# Altium PCB CrashDAQ For Hammond 1554H.PcbDoc (part 2 of 2)
Units mil, origin at the board's own origin, x right, y up, seen from the top; angles counter-clockwise.
Board outline 6580.35 x 4200 mil, 2 copper layers (Top Layer, Bottom Layer); 103 components, 88 nets, 462 pads, 122 vias.
Unrouted connection lines stored in the file: 5.
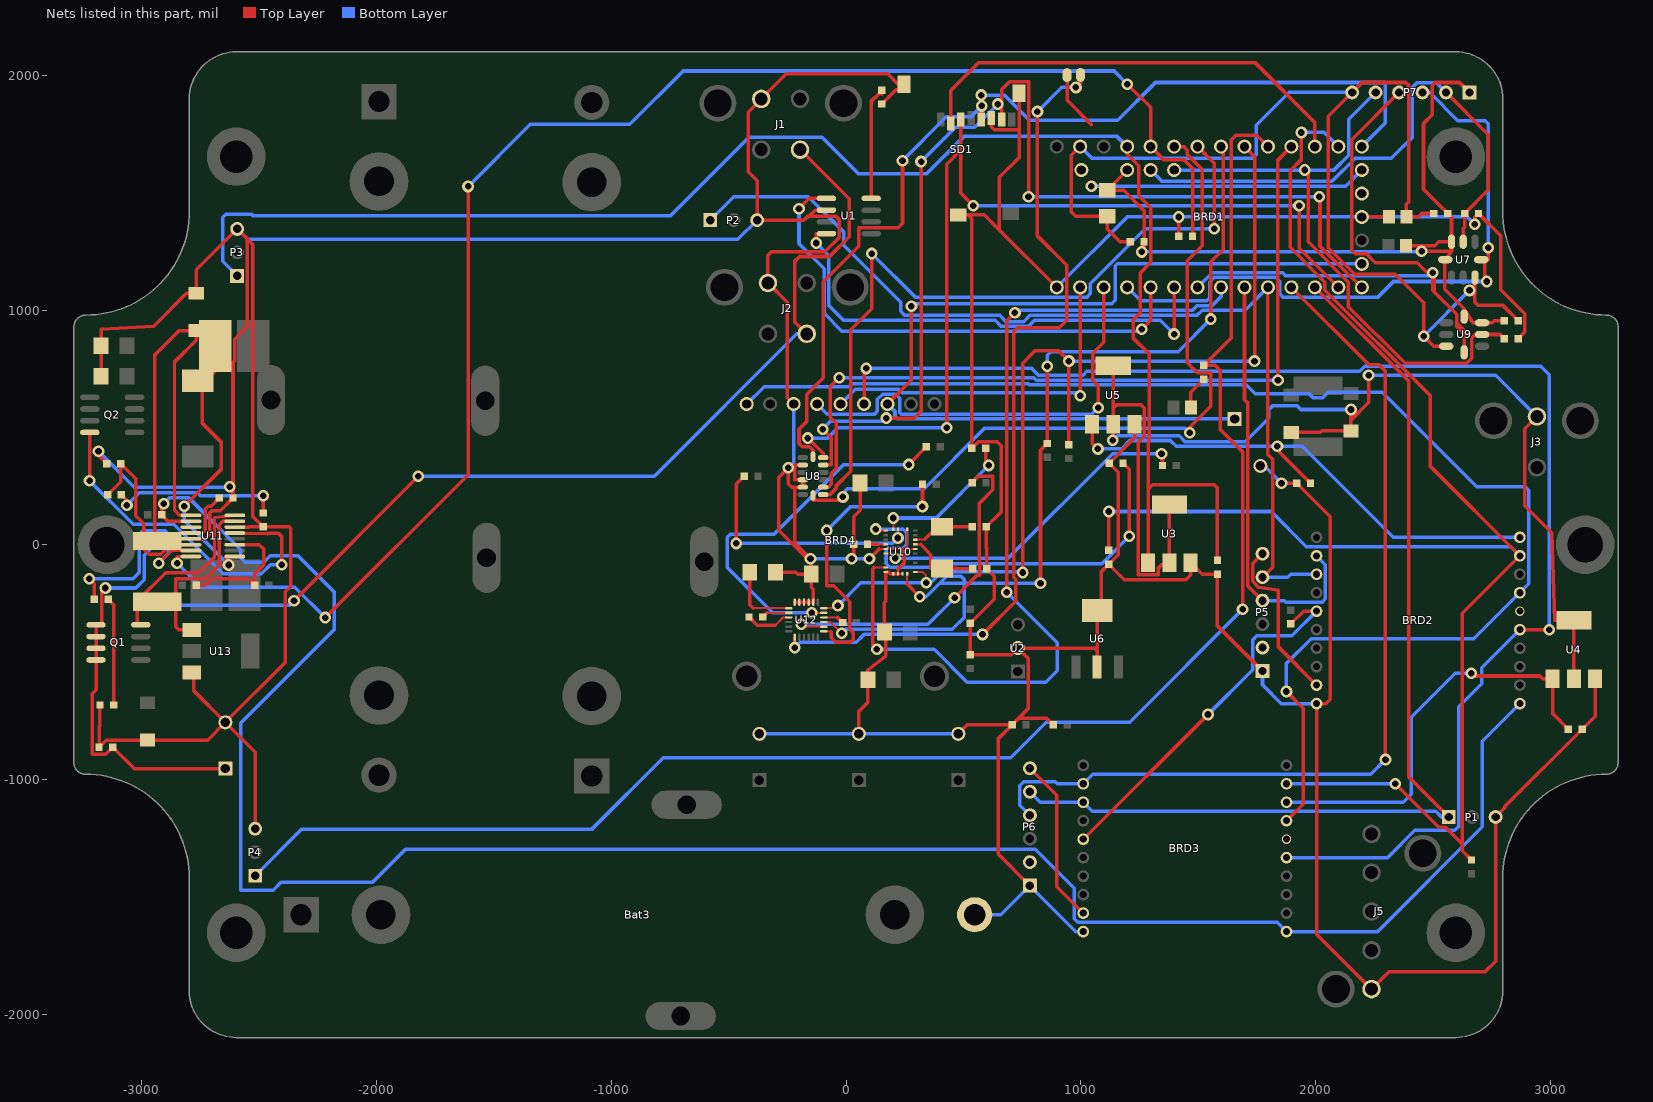
[diagram p2: the nets of this part, all layers, seen from the top]

## Via types
v1: diameter 50, hole 28, Top Layer to Bottom Layer, 122 vias

## Nets (pads, with @x,y where several pads share a name; then routed paths per layer and width w, separated by ;. In a path a pad name is that pad's centre, name@x,y a point inside that pad or via, vN(x,y) a via of type N, cw(c..) or ccw(c..) an arc to the next point about the centre after c; other vN are vias at no path point) (continued)
GND: Bat3.2 Batt1.2 BRD1.14 BRD1.17 BRD2.10 BRD3.10 BRD4.7 C3.2 C4.2 C5.1 C6.1 C7.2 C8.1 C9.1 C10.1 C12.1 C16.2 C17.1 C18.1 C19.2 C20.1 C21.1 C22.1 C23.1 C24.1 C25.1 C26.1 C27.1 C28.1 C29.1 C30.1 D3.1 J1.4 J2.4 J5.5 L2.1 NTC1.1 P1.3 P2.3 P3.3 P4.3 P5.1 P6.1 R1.1 R4.1 R8.1 R9.1 R10.1 R20.2 R21.1 R22.1 SD1.6 U1.2 U2.2 U3.3 U4.3 U5.3 U6.2 U6.4 U8.2 U8.4 U8.5 U10.2 U10.10 U10.15 U10.16 U10.17 U10.18 U10.25 U11.5 U11.14 U12.2 U12.3 U12.4 U12.5 U12.6 U13.3 Z2.2 | length 32903.1
  Top Layer w8.86: 140.85,-18.27 U10.10@169.54,-18.27 ; 221.21,-104.54 U10.17@221.21,-124.53 U10.18@240.89,-124.53 ; 234.8,-18.27 U10.10@169.54,-18.27 ; U10.2@260.58,65.47 260.58,-13.54 U10.10@169.54,-18.27 ; 265.3,-18.27 U10.25@294.48,-18.27
  Top Layer w14.17: U11.5@-2791.34,24.9 -2730.43,24.9 -2710.93,44.4 -2710.93,135.27
  Top Layer w15: v1(-3185.43,398.46) -3185.43,381.29 C21.1@-3149.61,345.47 ; C22.1@-3179.13,-683.07 -3179.13,-771.61 -3183.07,-775.54 C18.1@-3183.07,-863.19 -3152.56,-832.68 D3.1@-2976.38,-832.68 -2720.47,-832.68 C16.2@-2644.69,-756.89 ; C29.1@-3174.21,718.5 C30.1@-3174.21,847.44 -3174.21,918.96 -2950.43,931.46 -2810.48,1071.4 Z2.2@-2768.7,1071.4 -2768.7,1171.45 P3.3@-2594.49,1345.67 -2552.43,1303.61 ; U13.3@-2787.4,-544.29 -2780.43,-544.29 -2780.43,-621.15 C16.2@-2644.69,-756.89 ; -2710.93,135.27 -2701.7,144.49 -2666.54,144.49 R20.2@-2612.21,198.82 v1@-2612.21,232.24 ; v1(-2626.43,246.46) v1@-2612.21,232.24 ; U11.14@-2604.33,74.9 -2544.43,74.9 -2543.54,75.79 NTC1.1@-2483.27,75.79 ; P4.3@-2517.72,-1210.43 -2517.72,-883.86 C16.2@-2644.69,-756.89 ; C19.2@-300.2,-117.13 -213.8,-117.13 -205.93,-125 C23.1@-148.62,-125 ; BRD4.7@-223.3,599.28 -250.43,626.41 -250.43,1032.9 J2.4@-332.68,1115.16 -332.68,1233.7 -318.43,1247.96 -90.43,1247.96 -29.82,1308.56 -29.82,1385.85 -44.43,1400.46 -155.88,1400.46 ; U12.6@-218.5,-245.08 U12.5@-198.82,-245.08 U12.4@-179.13,-245.08 U12.3@-159.45,-245.08 U12.2@-139.76,-245.08 -139.76,-189.54 -148.62,-180.69 C23.1@-148.62,-125 ; U8.2@-183.96,339.57 -218.43,339.57 -219.43,338.57 -219.43,277.57 -218.43,276.57 U8.4@-183.96,276.57 U8.5@-183.96,245.08 -219.43,245.08 ; v1(-151.43,-59.54) -219.43,8.46 -219.43,245.08 ; U1.2@-83.66,1425.59 -130.74,1425.59 -155.88,1400.46 ; v1(23.57,-59.54) 32.48,-50.64 C17.1@32.48,1.97 32.48,118.46 60.04,146.01 C24.1@60.04,262.79 ; C4.2@54.63,-806.1 54.63,-710.54 93.5,-671.67 C27.1@93.5,-575.79 93.5,-533.54 169.07,-474.03 169.07,-413.73 C28.1@163.39,-372.05 163.39,-247.54 169.54,-241.39 U10.15@169.54,-116.69 181.57,-116.69 189.41,-124.53 U10.16@201.52,-124.53 U10.17@221.21,-124.53 ; v1(99.57,-59.54) 140.85,-18.27 ; R1.1@152.56,1877.95 213.06,1938.46 247.05,1938.46 SD1.6@247.05,1962.6 221.43,1962.6 177.57,2006.46 -254.37,2006.46 J1.4@-361.22,1899.6 -417.43,1843.4 -417.43,1589.74 -378.74,1551.06 P2.3@-378.74,1382.87 -180.6,1382.87 ; 221.21,-104.54 247.57,-78.18 247.57,-31.04 234.8,-18.27 ; 260.58,-13.54 265.3,-18.27 ; SD1.6@477.36,1405.51 519.07,1405.51 ; C3.2@478.34,-806.1 516.73,-767.72 C9.1@707.68,-767.72 ; SD1.6@619.49,1818.9 619.49,1781.46 632.49,1768.46 736.2,1768.46 737.2,1769.46 ; SD1.6@737.2,1923.23 737.2,1769.46 ; P6.1@783.46,-1452.76 649.57,-1318.87 649.57,-825.82 C9.1@707.68,-767.72 ; C8.1@882.87,-767.72 853.7,-738.54 736.85,-738.54 ; BRD1.14@897.83,1096.46 653.57,1340.72 ; U6.2@1069.88,-520.67 1069.88,-452.85 ; U5.3@1229.33,513.78 1229.33,455.71 R22.1@1121.06,347.44 1160.29,308.21 1160.29,-42.46 R4.1@1120.08,-82.68 ; C20.1@1417.32,1314.96 v1(1417.32,1396.46) ; P5.1@1774.61,-538.39 1582.68,-346.46 R8.1@1582.68,-125.98 1517.72,-125.98 U3.3@1468.5,-76.77 1468.5,-128.54 1448.4,-148.64 1186.04,-148.64 R4.1@1120.08,-82.68 ; v1(1855.57,261.46) 1920.28,261.46 R10.1@1920.28,261.81 2062.57,119.51 2062.57,-659.04 2044.45,-677.16 BRD2.10@2004.92,-677.16 2004.92,-1659.45 J5.5@2239.17,-1893.7 2312.33,-1820.54 2722.07,-1820.54 2767.91,-1774.71 P1.3@2767.91,-1160.43 2807.57,-1120.77 2807.57,-1115.65 R9.1@3136.81,-786.42 3191.93,-731.3 U4.3@3191.93,-570.87 ; BRD1.17@2197.83,1396.46 2254.57,1396.46 2255.76,1397.64 L2.1@2313.02,1397.64 ; v1(2678.57,1365.46) 2678.57,1395.11 C10.1@2694.88,1411.42 2789.57,1316.72 2789.57,1086.46 2892.57,983.46 2892.57,906.35 C12.1@2864.17,877.95 ; C16.2@-2644.69,-756.89 -2389.93,-502.13 -2389.93,-201.04 -2365.34,-176.46 -2365.34,67.96 -2373.17,75.79 NTC1.1@-2483.27,75.79 ; v1@-2612.21,232.24 -2612.21,777.68 -2605.43,784.46 -2605.43,875.46 -2552.43,928.46 -2552.43,1303.61 ; -2552.43,1303.61 -2528.96,1280.14 -2528.96,121.48 NTC1.1@-2483.27,75.79 ; -219.43,245.08 -230.93,245.08 -246.05,260.2 v1(-246.05,327.83) -287.43,286.46 -287.43,61.46 -148.62,-77.35 C23.1@-148.62,-125 ; -180.6,1382.87 -163.02,1400.46 -155.88,1400.46 ; -180.6,1382.87 -155.88,1400.46 ; 519.07,1405.51 536.42,1388.17 R21.1@536.42,410.43 564.67,438.68 644.07,438.68 660.74,422.01 660.74,139.09 C25.1@597.44,75.79 597.44,-12.58 599.41,-14.54 C26.1@599.41,-102.36 631.57,-134.53 631.57,-232.6 C5.1@529.53,-334.65 C6.1@529.53,-468.51 704.13,-468.51 U2.2@732.28,-440.35 ; 519.07,1405.51 588.78,1405.51 653.57,1340.72 ; 653.57,1340.72 653.57,1565.46 737.2,1649.09 737.2,1769.46 ; C9.1@707.68,-767.72 736.85,-738.54 ; U2.2@732.28,-440.35 1057.38,-440.35 1069.88,-452.85 ; U2.2@732.28,-440.35 775.57,-483.64 775.57,-699.82 736.85,-738.54 ; 1069.88,-452.85 U6.4@1069.88,-280.51 1086.57,-280.51 1086.57,-116.18 R4.1@1120.08,-82.68
  Bottom Layer w15: v1(-3185.43,398.46) -3032.43,245.46 -2627.43,245.46 v1(-2626.43,246.46) ; P3.3@-2594.49,1345.67 -2549.67,1300.85 -460.77,1300.85 P2.3@-378.74,1382.87 ; C7.2@-369.1,-806.1 C4.2@54.63,-806.1 99.01,-806.1 C3.2@478.34,-806.1 ; v1(-246.05,327.83) -223.3,350.59 BRD4.7@-223.3,599.28 ; v1(-151.43,-59.54) v1(23.57,-59.54) v1(99.57,-59.54) ; Bat3.2@548.19,-1576.77 659.45,-1576.77 P6.1@783.46,-1452.76 979.33,-1648.62 BRD3.10@1010.83,-1648.62 ; BRD1.14@897.83,1096.46 1197.83,1396.46 v1(1417.32,1396.46) BRD1.17@2197.83,1396.46 2647.57,1396.46 v1(2678.57,1365.46) ; Batt1.2@1765.75,335.63 1781.4,335.63 v1(1855.57,261.46) ; P5.1@1774.61,-538.39 1774.61,-597.36 1854.41,-677.16 BRD2.10@2004.92,-677.16
NetBatt1_1: Batt1.1 BRD1.15 BRD4.3 | length 4056.1
  Top Layer w15: BRD4.3@176.7,599.28 278.57,701.15 v1(278.57,1015.46)
  Bottom Layer w15: BRD4.3@176.7,599.28 208.57,567.41 208.57,546.13 218.75,535.96 507.07,535.96 507.4,535.63 Batt1.1@1655.51,535.63 ; v1(278.57,1015.46) 289.07,1025.96 1131.57,1025.96 1147.57,1041.96 1147.57,1188.46 1155.57,1196.46 BRD1.15@2197.83,1196.46
NetBRD1_1: BRD1.1 SD1.7 U8.12 | length 4616.5
  Top Layer w15: v1(-99.43,492.46) -62.5,455.53 -62.5,341.46 U8.12@-97.54,339.57 ; v1(171.57,539.46) 290.57,539.46 319.57,568.46 v1(319.57,1632.46) ; v1(646.57,1877.46) v1@662.79,1861.24 ; SD1.7@662.79,1811.02 v1@662.79,1861.24 ; v1(777.57,1482.46) 777.57,1972.13 776.57,1973.13 696.57,1973.13 662.79,1939.35 v1@662.79,1861.24 ; v1(2016.57,1482.46) 2019.57,1479.46 2019.57,1271.43 2158.55,1132.46 2161.83,1132.46 BRD1.1@2197.83,1096.46
  Bottom Layer w15: v1(-99.43,492.46) -66.43,525.46 157.57,525.46 v1(171.57,539.46) ; v1(319.57,1632.46) 466.57,1779.46 548.57,1779.46 v1(646.57,1877.46) ; v1(777.57,1482.46) v1(2016.57,1482.46)
NetBRD1_2: BRD1.2 SD1.3 U8.13 | length 4123.4
  Top Layer w15: v1(-162.93,454.46) -97.43,388.96 -97.43,371.06 U8.13@-97.54,371.06 ; v1(428.57,498.46) 428.57,1621.46 489.57,1682.46 ; SD1.3@489.57,1811.02 489.57,1682.46 ; v1(542.57,1444.46) 489.57,1497.46 489.57,1682.46 ; v1(1930.57,1444.46) 1930.57,1263.72 BRD1.2@2097.83,1096.46
  Bottom Layer w15: v1(-162.93,454.46) -78.43,454.46 -34.43,498.46 v1(428.57,498.46) ; v1(542.57,1444.46) v1(1930.57,1444.46)
NetBRD1_3: BRD1.3 BRD3.3 P1.1 P6.5 | length 4322.1
  Top Layer w15: BRD1.3@1997.83,1096.46 2398.57,695.72 2398.57,-991.1 P1.1@2567.91,-1160.43
  Bottom Layer w15: P6.5@783.46,-1052.76 828.15,-1097.44 BRD3.3@1010.83,-1097.44 1048.93,-1135.54 2512.68,-1135.54 2537.57,-1160.43 P1.1@2567.91,-1160.43
NetBRD1_4: BRD1.4 BRD3.2 P6.4 | length 3958.1
  Top Layer w15: BRD1.4@1897.83,1096.46 2226.68,767.61 2270.02,767.61 2298.57,739.05 v1(2298.57,-915.54)
  Bottom Layer w15: P6.4@783.46,-1152.76 740.57,-1109.87 740.57,-1026.54 756.57,-1010.54 891.42,-1010.54 899.57,-1018.7 BRD3.2@1010.83,-1018.7 1050.98,-978.54 2235.57,-978.54 v1(2298.57,-915.54)
NetBRD1_5: BRD1.5 BRD2.3 P2.1 P5.5 | length 4251.3
  Top Layer w15: P5.5@1774.61,-138.39 1817.57,-95.42 1817.57,363.46 1797.83,383.2 BRD1.5@1797.83,1096.46
  Bottom Layer w15: P2.1@-578.74,1382.87 -478.71,1482.9 -161.21,1482.9 -10.51,1332.2 -10.51,1275.54 232.55,1032.48 232.55,993.96 249.01,977.49 654.35,977.49 681.68,950.17 756.68,950.17 784,977.49 1495.61,977.49 1517.07,998.96 1700.33,998.96 BRD1.5@1797.83,1096.46 ; P5.5@1774.61,-138.39 1882.57,-138.39 1894.98,-125.98 BRD2.3@2004.92,-125.98
NetBRD1_6: BRD1.6 BRD2.2 P5.4 | length 1842.1
  Top Layer w15: BRD1.6@1697.83,1096.46 1697.83,618.31 1712.58,603.56 1712.58,-176.36 P5.4@1774.61,-238.39
  Bottom Layer w15: P5.4@1774.61,-238.39 1867.42,-238.39 1873.57,-244.54 2029.07,-244.54 2042.57,-231.04 2042.57,-84.9 BRD2.2@2004.92,-47.24
NetBRD1_7: BRD1.7 U10.14 | length 3830.7
  Top Layer w8.86: 119.07,-97.01 U10.14@169.54,-97.01
  Top Layer w15: 119.07,-97.01 113.57,-102.51 113.57,-427.54 v1(131.57,-445.54) ; v1(684.57,-202.54) 684.57,953.46 v1(719.57,988.46)
  Bottom Layer w15: v1(131.57,-445.54) 375.57,-445.54 515.57,-585.54 851.57,-585.54 899.57,-537.54 899.57,-417.54 v1(684.57,-202.54) ; v1(719.57,988.46) 729.57,998.46 1476.57,998.46 1497.07,1018.96 1560.53,1018.96 1597.83,1056.26 BRD1.7@1597.83,1096.46
NetBRD1_8: BRD1.8 P7.4 U9.4 | length 2709.2
  Top Layer w15: P7.4@2356.5,1927.16 2154.57,1725.24 2154.57,1253.96 2169.07,1239.46 2217.57,1239.46 2255.57,1201.46 2433.99,1201.46 v1@2499.57,1135.87 ; v1(2499.57,1158.96) v1@2499.57,1135.87 ; U9.4@2633.86,819.29 2633.86,896.17 ; v1@2499.57,1135.87 2507.25,1128.2 2507.25,1075.78 ; v1@2499.57,1135.87 2499.57,1083.46 2507.25,1075.78 ; 2507.25,1075.78 2601.57,981.46 2601.57,944.74 ; 2601.57,944.74 2633.86,912.46 2633.86,896.17 ; 2601.57,944.74 2601.57,928.46 2633.86,896.17
  Bottom Layer w15: BRD1.8@1497.83,1096.46 1560.33,1158.96 1860.33,1158.96 1872.83,1146.46 2487.07,1146.46 v1(2499.57,1158.96)
NetBRD1_9: BRD1.9 U1.4 | length 2114.4
  Top Layer w15: v1(-127.43,1285.46) -126.43,1325.59 U1.4@-83.66,1325.59 ; v1(1397.83,897.46) BRD1.9@1397.83,1096.46
  Bottom Layer w15: v1(-127.43,1285.46) -73.53,1231.56 -73.53,1018.96 -11.03,956.46 635.18,956.46 661.68,929.96 776.68,929.96 803.18,956.46 1338.83,956.46 v1(1397.83,897.46)
NetBRD1_10: BRD1.10 U1.1 | length 2207.3
  Top Layer w15: v1(-200.43,1431.46) -156.29,1475.59 U1.1@-83.66,1475.59 ; v1(1260.33,918.46) 1297.83,955.96 BRD1.10@1297.83,1096.46
  Bottom Layer w15: v1(-200.43,1431.46) -200.43,1282.96 -93.53,1176.06 -93.53,985.8 -17.68,909.96 1251.83,909.96 v1(1260.33,918.46)
NetBRD1_11: BRD1.11 P7.3 U7.4 | length 2773.4
  Top Layer w15: U7.4@2706.3,1214.57 U7.4@2721.57,1214.57 ; v1(2729.57,1121.46) 2721.57,1129.46 U7.4@2721.57,1214.57 ; v1(2736.57,1265.46) 2736.57,1214.57 U7.4@2721.57,1214.57
  Bottom Layer w15: BRD1.11@1197.83,1096.46 1255.33,1038.96 1537.07,1038.96 1549.07,1050.96 1549.07,1118.96 1569.07,1138.96 1831.57,1138.96 1847.57,1122.96 1847.57,1068.96 1863.07,1053.46 2264.57,1053.46 2332.57,1121.46 v1(2729.57,1121.46) ; P7.3@2456.5,1927.16 2486.57,1927.16 2607.28,1806.46 2724.07,1806.46 2736.57,1793.96 v1(2736.57,1265.46)
NetBRD1_12: BRD1.12 BRD4.6 | length 1905
  Top Layer w15: v1(1074.57,583.46) 1074.57,676.11 1050.57,700.11 1050.57,815.46 1097.83,862.72 BRD1.12@1097.83,1096.46
  Bottom Layer w15: BRD4.6@-123.3,599.28 -80.47,556.46 121.07,556.46 133.57,568.96 133.57,618.96 156.4,641.78 210.25,641.78 228.77,623.26 228.77,562.26 234.57,556.46 1047.57,556.46 v1(1074.57,583.46)
NetBRD1_13: BRD1.13 BRD4.5 | length 1519.6
  Top Layer w15: v1(997.83,634.96) BRD1.13@997.83,1096.46
  Bottom Layer w15: BRD4.5@-23.3,599.28 39.2,661.78 224.88,661.78 239.2,647.46 985.33,647.46 v1(997.83,634.96)
NetBRD1_18: BRD1.18
NetBRD1_19: BRD1.19 JP1.1 | length 1434.3
  Top Layer w15: JP1.1@941.96,2000.98 941.96,1894.07 1045.57,1790.46
  Bottom Layer w15: v1(1045.57,1527.46) 2128.83,1527.46 BRD1.19@2197.83,1596.46
NetBRD1_20: BRD1.20 SD1.5 U8.14 | length 4272.7
  Top Layer w15: U8.14@-140.75,374.9 -140.75,401.78 -155.93,416.96 -185.93,416.96 -200.43,431.46 -200.43,491.96 -166.43,525.96 -166.43,641.46 -97.43,710.46 -97.43,1120.96 53.44,1271.82 53.44,1349.46 54.44,1350.46 222.07,1350.46 240.57,1368.96 v1(240.57,1636.46) ; SD1.5@576.18,1811.02 v1@576.18,1867.06 ; v1(576.18,1915.93) v1@576.18,1867.06 ; v1(578.57,1869.46) v1@576.18,1867.06
  Bottom Layer w15: v1(240.57,1636.46) 427.57,1823.46 532.57,1823.46 v1(578.57,1869.46) ; v1(576.18,1915.93) 673.6,1915.93 781.57,1807.96 1157.07,1807.96 1318.57,1969.46 2292.57,1969.46 2298.57,1963.46 2298.57,1797.2 BRD1.20@2197.83,1696.46
NetBRD1_21: BRD1.21 BRD2.19 BRD3.19 R3.2 R4.2 | length 6674.5
  Top Layer w15: R4.2@1120.08,-23.62 v1(1120.08,141.46) ; v1(1940.57,1756.46) 1940.57,1641.46 1892.57,1593.46 1892.57,1266.72 2040.33,1118.96 2040.33,1084.7 2488.57,636.46 2488.57,335.24 BRD2.19@2871.06,-47.24 2625.57,-292.73 2625.57,-1275.2 ; v1(2340.55,-1018.7) 2525.57,-1203.72 2554.09,-1203.72 2625.57,-1275.2 ; R3.2@2665.35,-1343.51 2625.57,-1303.73 2625.57,-1275.2
  Bottom Layer w15: v1(1120.08,141.46) 1811.57,141.46 1961.57,-8.54 2832.36,-8.54 BRD2.19@2871.06,-47.24 ; BRD3.19@1876.97,-1018.7 v1(2340.55,-1018.7) ; v1(1940.57,1756.46) 2037.83,1756.46 BRD1.21@2097.83,1696.46
NetBRD1_22: BRD1.22 SD1.2 | length 1949.2
  Top Layer w15: SD1.2@446.26,1795.27 446.26,1935.14 565.57,2054.46 1742.33,2054.46 1997.83,1798.96 BRD1.22@1997.83,1696.46
NetBRD1_23: BRD1.23 U8.9 | length 3421.8
  Top Layer w15: U8.9@-97.54,245.08 -74.43,245.08 -62.5,257 -62.5,304.46 -42.43,324.53 -42.43,517.46 -66.43,541.46 -66.43,674.46 v1(-29.43,711.46) ; v1(1840.57,700.78) 1840.57,1639.2 BRD1.23@1897.83,1696.46
  Bottom Layer w15: v1(-29.43,711.46) 800.07,711.46 810.75,700.78 v1(1840.57,700.78)
NetBRD1_24: BRD1.24 P4.1 R2.2 | length 7007
  Top Layer w15: v1(1689.57,-275.54) 1689.57,396.46 1593.57,492.46 1593.57,743.96 1573.75,763.78 R2.2@1524.61,763.78 1640.57,879.75 1640.57,1723.46 1661.07,1743.96 1750.33,1743.96 BRD1.24@1797.83,1696.46
  Bottom Layer w15: P4.1@-2517.72,-1410.43 -2320.83,-1213.54 -1084.43,-1213.54 -778.43,-907.54 702.57,-907.54 853.57,-756.54 1208.57,-756.54 v1(1689.57,-275.54)
NetBRD1_25: BRD1.25 R6.1 U10.20 U12.24 | length 4204.8
  Top Layer w8.86: U12.24@-94.49,-270.67 v1@-45.62,-270.67 ; U10.20@294.48,-116.69 327.22,-116.69 341.57,-131.04 v1(341.57,-162.54)
  Top Layer w15: v1@-45.62,-270.67 v1(-34.5,-259.54) ; v1(752.57,-118.54) 752.57,773.46 804.57,825.46 906.8,825.46 v1(949.8,782.46) R6.1@949.8,426.18 ; BRD1.25@1697.83,1696.46 1740.57,1653.72 v1(1740.57,782.46)
  Bottom Layer w15: v1(-34.5,-259.54) 62.5,-162.54 v1(341.57,-162.54) 361.07,-162.54 408.57,-115.04 749.07,-115.04 v1(752.57,-118.54) ; v1(949.8,782.46) v1(1740.57,782.46)
NetBRD1_26: BRD1.26 R5.1 U10.19 U12.21 | length 4090.7
  Top Layer w8.86: U12.21@-94.49,-329.73 -66.24,-329.73 v1(-18.43,-377.54) ; 260.58,-167.54 U10.19@260.58,-124.53
  Top Layer w15: 260.58,-167.54 v1(314.58,-221.54) ; v1(828.57,-164.04) 828.57,402.39 R5.1@857.28,431.1 857.57,431.1 v1(857.57,759.96) ; v1(1554.57,961.46) 1554.57,1205.46 1606.57,1257.46 1606.57,1687.72 BRD1.26@1597.83,1696.46
  Bottom Layer w15: v1(-18.43,-377.54) -1.43,-360.54 452.57,-360.54 504.57,-308.54 504.57,-164.04 ; v1(314.58,-221.54) 342.07,-221.54 399.57,-164.04 ; v1(828.57,-164.04) 504.57,-164.04 ; v1(857.57,759.96) 857.57,806.46 873.57,822.46 1415.57,822.46 v1(1554.57,961.46) ; 399.57,-164.04 428.57,-135.04 490.07,-135.04 504.57,-149.54 504.57,-164.04 ; 399.57,-164.04 504.57,-164.04
NetBRD1_27: BRD1.27 U8.8 | length 3192.3
  Top Layer w15: U8.8@-97.54,213.58 -68.43,213.58 -42.5,239.51 -42.5,250.32 19.57,312.39 19.57,915.46 109.57,1005.46 v1(109.57,1240.46) ; BRD1.27@1497.83,1696.46 1568.57,1625.72 v1(1568.57,1346.46)
  Bottom Layer w15: v1(109.57,1240.46) 296.57,1053.46 1025.07,1053.46 1040.57,1068.96 1040.57,1112.46 1274.57,1346.46 v1(1568.57,1346.46)
NetBRD1_28: BRD1.28 U8.7 | length 3201.1
  Top Layer w15: U8.7@-140.75,209.74 -140.75,189.46 -27.43,189.46 v1(-13.43,203.46) ; BRD1.28@1397.83,1696.46 1439.57,1696.46 1454.57,1681.46 1454.57,1662.46 1518.57,1598.46 1518.57,1274.46 1454.57,1210.46 1454.57,775.46 1496.57,733.46 1552.57,733.46 1553.57,732.46 1553.57,589.46 1464.57,500.46 v1(1464.57,476.46)
  Bottom Layer w15: v1(-13.43,203.46) -13.43,218.96 6.07,238.46 332.57,238.46 589.75,495.63 1445.4,495.63 v1(1464.57,476.46)
NetBRD1_29: BRD1.29 C20.2 U11.8 | length 6752.3
  Top Layer w14.17: v1(-2850.43,-79.54) -2850.43,-51.1 U11.8@-2791.34,-50.1
  Top Layer w15: v1(-2219.43,-310.54) -1610.43,298.46 v1(-1610.43,1526.46) ; v1(1198.57,1962.46) 1297.83,1863.2 BRD1.29@1297.83,1696.46 1354.83,1639.46 1440.57,1639.46 1476.38,1603.65 C20.2@1476.38,1314.96
  Bottom Layer w15: v1(-2850.43,-79.54) -2748.43,-181.54 -2348.43,-181.54 v1(-2219.43,-310.54) ; v1(-1610.43,1526.46) -1345.43,1791.46 -921.43,1791.46 -694.43,2018.46 1142.57,2018.46 v1(1198.57,1962.46)
NetBRD1_30: BRD1.30 P3.1 R8.2 U3.1 | length 6915.5
  Top Layer w15: BRD1.30@1197.83,1696.46 1197.83,1663.96 1247.57,1614.22 1247.57,1487.46 1298.57,1436.46 1298.57,1203.17 1254.57,1159.17 1254.57,987.7 1222.83,955.96 1222.83,880.96 1291.36,812.43 1291.36,441.91 1287.4,437.95 1287.4,236.28 ; U3.1@1287.4,-76.77 1287.4,236.28 ; R8.2@1582.68,-66.93 1582.68,241.85 1569.07,255.46 1306.57,255.46 1287.4,236.28
  Bottom Layer w15: P3.1@-2594.49,1145.67 -2656.52,1207.7 -2656.52,1394.61 -2643.43,1407.7 -2532.46,1407.7 -2527.22,1402.46 -746.43,1402.46 -413.43,1735.46 -102.43,1735.46 51.57,1581.46 344.57,1581.46 502.57,1739.46 1154.83,1739.46 BRD1.30@1197.83,1696.46
NetBRD1_32: BRD1.32 C1.1 C2.1 C11.1 C13.1 L2.2 P7.6 U7.3 U9.3 | length 5042.9
  Top Layer w15: BRD1.32@997.83,1696.46 960.33,1658.96 960.33,1418.2 978.92,1399.61 C1.1@1113.19,1399.61 1113.19,1345.46 1167.31,1291.34 C2.1@1210.63,1291.34 ; C11.1@2504.92,1411.2 2453.13,1411.2 2439.57,1397.64 L2.2@2387.83,1397.64 2387.83,1450.71 2398.57,1461.46 2398.57,1956.46 2385.57,1969.46 2198.79,1969.46 P7.6@2156.5,1927.16 2054.57,1825.24 2054.57,1265.05 2166.94,1152.69 2340.34,1152.69 2461.57,1031.46 v1(2461.57,888.46) 2504.36,845.67 U9.3@2557.48,845.67 ; v1(2656.57,1083.46) 2679.92,1106.8 ; U7.3@2679.92,1138.19 2679.92,1106.8 ; C13.1@2864.17,954.72 2799.44,1019.46 2694.07,1019.46 2679.92,1033.61 2679.92,1106.8
  Bottom Layer w15: BRD1.32@997.83,1696.46 1047.83,1646.46 1731.57,1646.46 1747.57,1662.46 1747.57,1786.96 1887.78,1927.16 P7.6@2156.5,1927.16 ; v1(2461.57,888.46) v1(2656.57,1083.46)
NetBRD1_34: BRD1.34
NetBRD1_35: BRD1.35 C1.2 C2.2 C11.2 C13.2 L1.1 P7.1 U7.7 U7.8 U9.7 U9.8 | length 3499
  Top Layer w15: BRD1.35@1197.83,1596.46 1197.83,1595.1 1113.19,1510.46 C1.2@1113.19,1509.84 1183.19,1509.84 1269.68,1423.35 C2.2@1269.68,1291.34 1269.68,1256.57 v1(1260.57,1247.46) ; L1.1@2385.79,1273.62 2508.93,1273.62 2526.25,1290.94 U7.7@2579.92,1290.94 ; v1(2452.57,1250.46) 2579.92,1250.46 ; U9.8@2633.86,972.05 2633.86,1005.46 ; P7.1@2656.5,1927.16 2614.2,1969.46 2511.57,1969.46 2498.57,1956.46 2498.57,1832.46 2460.57,1794.46 2460.57,1514.6 C11.2@2563.98,1411.2 2579.92,1395.25 U7.7@2579.92,1290.94 ; C13.2@2805.12,954.72 2761.63,954.72 2752.57,945.67 U9.7@2710.24,945.67 2670.86,945.67 2648.81,981.3 2633.86,1005.46 ; 2579.92,1250.46 U7.7@2579.92,1290.94 ; 2579.92,1250.46 U7.8@2553.54,1214.57 2551.57,1214.57 2551.57,1087.74 2633.86,1005.46
  Bottom Layer w15: v1(1260.57,1247.46) 2449.57,1247.46 v1(2452.57,1250.46)
NetBRD2_5: BRD2.5 BRD3.5 R7.1 | length 1602.6
  Top Layer w15: BRD3.5@1010.83,-1254.92 v1(1542.2,-723.54) ; R7.1@1895.67,-337.6 1949.8,-283.46 BRD2.5@2004.92,-283.46
  Bottom Layer w15: v1(1542.2,-723.54) 1732.57,-533.17 1732.57,-406.04 1750.07,-388.54 1899.84,-388.54 BRD2.5@2004.92,-283.46
NetBRD2_9: BRD2.9 P5.6 | length 728.6
  Top Layer w15: P5.6@1774.61,-38.39 1732.58,-80.41 1732.58,-156.55 1756.57,-180.54 1842.57,-193.54 1842.57,-436.08 BRD2.9@2004.92,-598.42
NetBRD2_11: BRD2.11 BRD3.11 R19.1 U11.2 | length 8929.9
  Top Layer w14.17: -2889.27,99.9 U11.2@-2791.34,99.9
  Top Layer w15: v1(-2907.43,173.96) -2916.34,165.04 R19.1@-2916.34,126.97 -2889.27,99.9
  Bottom Layer w15: v1(-2907.43,173.96) -2880.43,200.96 -2801.93,200.96 -2579.43,-21.54 -2579.43,-56.04 -2560.37,-75.1 -2481.43,-75.1 -2453.87,-47.54 -2335.43,-47.54 -2181.43,-201.54 -2181.43,-361.54 -2579.74,-759.86 -2579.74,-1471.14 -2578.43,-1472.46 -2441.34,-1472.46 -2407.43,-1438.54 -2017.97,-1438.54 -1876.97,-1297.54 806.57,-1297.54 972.57,-1463.54 972.57,-1593.54 988.57,-1609.54 1837.89,-1609.54 BRD3.11@1876.97,-1648.62 2264.5,-1648.62 2710.57,-1202.54 2710.57,-837.65 BRD2.11@2871.06,-677.16
NetBRD2_15: BRD2.15 BRD3.15 BRD4.4 | length 6054.7
  Top Layer w15: BRD4.4@76.7,599.28 76.7,741.09 v1(86.57,750.96) ; BRD2.15@2871.06,-362.2 v1(2996.57,-362.2)
  Bottom Layer w15: v1(86.57,750.96) 791.57,750.96 820.07,722.46 1010.36,722.46 1026.36,738.46 2189.01,738.46 2210.52,759.96 2960.07,759.96 2996.57,723.46 v1(2996.57,-362.2) ; BRD3.15@1876.97,-1333.66 2307.46,-1333.66 2423.57,-1217.54 2594.07,-1217.54 2610.57,-1201.04 2610.57,-690.7 2708.26,-593.01 2708.26,-525.01 BRD2.15@2871.06,-362.2
NetBRD2_16: BRD2.16
NetBRD2_17: BRD2.17 BRD3.17 BRD4.9 | length 5876.2
  Top Layer w15: v1(1876.57,-625.54) 1947.57,-696.54 1947.57,-1105.57 BRD3.17@1876.97,-1176.18
  Bottom Layer w15: BRD4.9@-423.3,599.28 -349.06,673.51 11.13,673.51 23.75,686.13 776.4,686.13 781.75,680.78 1704.75,680.78 1743.07,642.46 1972.85,642.46 1989.57,625.73 2031.49,625.73 2055.21,649.46 2284.57,649.46 2687.57,246.46 2894.07,246.46 2908.57,231.96 2908.57,-167.21 BRD2.17@2871.06,-204.72 2675.24,-400.54 1981.57,-400.54 1876.57,-505.54 v1(1876.57,-625.54)
NetBRD2_20: BRD2.20 R10.2 U5.1 | length 2313.1
  Top Layer w15: U5.1@1048.23,513.78 1048.23,432.96 v1(1073.23,407.96) ; v1(1838.07,418.96) 1848.57,392.57 R10.2@1979.33,261.81
  Bottom Layer w15: v1(1073.23,407.96) 1174.07,407.96 1210.07,443.96 1382.07,443.96 1407.07,418.96 v1(1838.07,418.96) 1944.32,418.96 2331.78,31.5 BRD2.20@2871.06,31.5
NetBRD3_9: BRD3.9 P6.6 | length 711.3
  Top Layer w15: P6.6@783.46,-952.76 898.57,-1067.87 898.57,-1457.63 BRD3.9@1010.83,-1569.88
NetBRD3_16: BRD3.16
NetBRD3_18: BRD3.18 R9.2 U4.1 | length 1807.3
  Top Layer w15: v1(2663.57,-547.54) 2675.57,-559.54 2956.57,-559.54 2968.57,-571.54 U4.1@3010.83,-571.54 ; U4.1@3010.83,-570.87 U4.1@3010.83,-571.54 ; R9.2@3077.76,-786.42 3010.83,-719.49 U4.1@3010.83,-571.54
  Bottom Layer w15: BRD3.18@1876.97,-1097.44 2374.18,-1097.44 2408.57,-1063.04 2408.57,-734.54 2595.57,-547.54 v1(2663.57,-547.54)
NetC14_2: C14.2 R12.1 U11.11 | length 573.5
  Top Layer w14.17: U11.11@-2604.33,-0.1 -2499.87,-0.1
  Top Layer w15: C14.2@-2768.7,-173.23 -2729.67,-173.23 -2701.43,-144.98 -2547.93,-144.98 R12.1@-2519.69,-173.23 -2519.69,-124.8 -2481.43,-86.54 -2481.43,-18.54 -2499.87,-0.1
NetC15_1: C15.1 U12.9 | length 197
  Top Layer w8.86: -300.93,-342.54 -268.43,-310.04 U12.9@-244.1,-310.04
  Top Layer w15: C15.1@-413.39,-308.07 -378.91,-342.54 -300.93,-342.54
NetC15_2: C15.2 U12.8 | length 117.6
  Top Layer w8.86: -336.62,-290.36 U12.8@-244.1,-290.36
  Top Layer w15: C15.2@-354.33,-308.07 -336.62,-290.36
NetC17_2: C17.2 U10.9 | length 78.2
  Top Layer w8.86: 137.13,1.42 U10.9@169.54,1.42
  Top Layer w15: C17.2@91.53,1.97 136.57,1.97 137.13,1.42
NetC19_1: C19.1 U12.7 | length 311.3
  Top Layer w8.86: -395.81,-270.67 U12.7@-244.1,-270.67
  Top Layer w15: C19.1@-410.43,-117.13 -410.43,-256.04 -395.81,-270.67
NetC21_2: C21.2 R24.1 U11.6 | length 788
  Top Layer w14.17: -2919.85,-41.04 -2878.91,-0.1 U11.6@-2791.34,-0.1
  Top Layer w15: R24.1@-3146.65,212.6 -3090.55,268.7 C21.2@-3090.55,345.47 -3026.43,281.35 -3026.43,123.77 -2992.11,89.46 -2992.11,-18.54 -2969.61,-41.04 -2919.85,-41.04
NetC22_2: C22.2 R23.2 | length 459.6
  Top Layer w15: R23.2@-3143.7,-233.27 -3120.08,-256.89 C22.2@-3120.08,-683.07
NetC25_2: C25.2 U10.27 X1.2 | length 266.6
  Top Layer w8.86: U10.27@294.48,21.1 298.57,21.1 299.87,22.4 335.4,22.4
  Top Layer w15: 335.4,22.4 388.78,75.79 X1.2@408.46,75.79 C25.2@538.39,75.79
NetC26_2: C26.2 U10.26 X1.1 | length 323.5
  Top Layer w8.86: U10.26@294.48,1.42 317.57,1.42
  Top Layer w15: 317.57,1.42 361.24,-42.25 361.24,-101.38 X1.1@408.46,-101.38 473.57,-101.38 474.56,-102.36 C26.2@540.35,-102.36
NetD1_2: D1.2 R2.1 | length 142.9
  Top Layer w15: D1.2@1469.52,584.65 1469.52,649.64 R2.1@1524.61,704.72
NetJP1_2: JP1.2 U12.13 | length 3674.2
  Top Layer w8.86: v1(-218.5,-438.54) U12.13@-218.5,-394.69
  Top Layer w15: v1(581.57,-382.54) 722.57,-241.54 722.57,-146.54 714.57,-138.54 714.57,907.46 731.57,924.46 908.57,924.46 940.57,956.46 940.57,1190.46 815.57,1315.46 v1(815.57,1845.46) ; v1(979.57,1948.46) 999.02,1967.9 JP1.2@999.02,2001.97
  Bottom Layer w15: v1(-218.5,-438.54) -195,-415.04 44.07,-415.04 76.57,-382.54 v1(581.57,-382.54) ; v1(815.57,1845.46) 918.57,1948.46 v1(979.57,1948.46)
NetL3_2: L3.2 R25.1 U11.9 | length 1263.2
  Top Layer w14.17: v1(-2630.93,-86.54) -2643.43,-74.04 -2643.43,-50.1 U11.9@-2604.33,-50.1
  Top Layer w15: v1(-2820.43,163.46) -2661.43,322.46 -2661.43,435.46 -2742.43,516.46 L3.2@-2742.43,698.82 ; L3.2@-2761.81,698.82 L3.2@-2742.43,698.82 ; R25.1@-2635.83,846.46 -2635.83,791.69 -2728.7,698.82 L3.2@-2742.43,698.82
  Bottom Layer w15: v1(-2820.43,163.46) -2820.43,102.96 v1(-2630.93,-86.54)
NetNTC1_2: NTC1.2 R24.2 | length 736.2
  Top Layer w15: R24.2@-3087.6,212.6 -3064.21,189.2 v1(-3064.21,167.96) ; NTC1.2@-2483.27,134.84 v1(-2483.27,208.84)
  Bottom Layer w15: v1(-3064.21,167.96) -3011.21,220.96 -2762.93,220.96 -2750.81,208.84 v1(-2483.27,208.84)
NetP5_2: P5.2
NetP6_2: P6.2
NetQ1_4: Q1.4 U11.16 | length 778.9
  Top Layer w14.17: -2691.43,-54.54 -2691.43,115.9 U11.16@-2604.33,124.9
  Top Layer w15: Q1.4@-3004.92,-341.34 -3019.43,-341.34 -3019.43,-239.54 -2899.36,-119.48 -2756.36,-119.48 -2691.43,-54.54
NetQ2_4: Q2.4 U11.13 | length 1534.2
  Top Layer w14.17: U11.13@-2604.33,49.9 -2567.43,49.9 -2567.43,47.46 -2463.53,47.46
  Top Layer w15: v1(-3223.43,272.46) -3223.43,478.15 Q2.4@-3222.44,478.15 ; -2463.53,47.46 -2462.51,48.47 -2418.43,48.47 -2404.93,34.97 v1(-2404.93,-85.54)
  Bottom Layer w15: v1(-3223.43,272.46) -3037.43,86.46 -2864.93,86.46 -2653.93,-124.54 -2491.37,-124.54 -2452.37,-85.54 v1(-2404.93,-85.54)
NetR1_2: R1.2 U1.8 | length 496.5
  Top Layer w15: U1.8@107.28,1475.59 106.57,1475.59 106.57,1888.46 144.57,1926.45 145.06,1926.45 152.56,1918.96 R1.2@152.56,1937.01
NetR11_1: R11.1 U12.23 | length 1628
  Top Layer w8.86: v1(-145.61,-290.36) U12.23@-94.49,-290.36
  Top Layer w15: v1(266.65,341.46) R11.1@342.52,417.32
  Bottom Layer w15: v1(-145.61,-290.36) -312.61,-290.36 -505.93,-97.04 -505.93,30.96 -493.43,43.46 -308.43,43.46 -10.43,341.46 v1(266.65,341.46)
NetR13_1: R13.1 U12.22 | length 88.7
  Top Layer w8.86: U12.22@-94.49,-310.04 -36.42,-310.04
  Top Layer w15: -36.42,-310.04 R13.1@-14.76,-331.69
NetR14_1: R14.1 U12.19 | length 1237.4
  Top Layer w8.86: U12.19@-94.49,-369.1 -63.94,-369.1 -62.49,-370.54
  Top Layer w15: v1(-82.43,60.46) -82.43,-174.54 -81.43,-175.54 -51.93,-175.54 15.57,-243.04 15.57,-360.54 31.57,-376.54 31.57,-402.54 19.07,-415.04 -43.43,-415.04 -62.49,-395.98 -62.49,-370.54 ; v1(325.57,162.46) 325.79,162.67 R14.1@325.79,256.89
  Bottom Layer w15: v1(-82.43,60.46) 19.57,162.46 v1(325.57,162.46)
NetR15_1: R15.1 U12.20 | length 1492.5
  Top Layer w8.86: v1@-180.56,-349.41 U12.20@-94.49,-349.41
  Top Layer w15: v1(-190.43,-339.54) v1@-180.56,-349.41 ; v1(462.57,-226.05) 558.07,-130.54 568.57,-130.54 569.57,-129.54 569.57,-74.54 568.57,-73.54 568.57,176.46 625.57,233.46 625.57,291.46 624.57,292.46 566.08,292.46 R15.1@537.4,263.78
  Bottom Layer w15: v1(-190.43,-339.54) 349.07,-339.54 v1(462.57,-226.05)
NetR17_1: R17.1 U10.4 | length 1036.6
  Top Layer w8.86: v1(221.21,28.46) U10.4@221.21,65.47
  Top Layer w15: v1(-467.93,5.46) -467.93,258.45 R17.1@-434.06,292.32
  Bottom Layer w15: v1(-467.93,5.46) 198.21,5.46 v1(221.21,28.46)
NetR18_1: R18.1 U10.11 | length 1419.7
  Top Layer w8.86: U10.11@169.54,-37.95 189.57,-37.95
  Top Layer w15: 189.57,-37.95 v1(209.57,-57.95) ; v1(1344.07,387.96) 1348.43,383.6 R18.1@1348.43,337.6
  Bottom Layer w15: v1(209.57,-57.95) 690.16,-57.95 1136.07,387.96 v1(1344.07,387.96)
NetR20_1: R20.1 U11.4 | length 234.2
  Top Layer w14.17: U11.4@-2791.34,49.9 -2743.43,49.9 -2730.93,62.4 -2730.93,151.99
  Top Layer w15: -2730.93,151.99 -2718.43,164.49 -2705.59,164.49 R20.1@-2671.26,198.82
NetR21_2: R21.2 U10.5 | length 625.3
  Top Layer w8.86: U10.5@201.52,65.47 v1(201.52,113.7)
  Top Layer w15: R21.2@595.47,410.43 595.47,350.35 v1(607.97,337.85)
  Bottom Layer w15: v1(201.52,113.7) 383.82,113.7 v1(607.97,337.85)
NetR22_2: R22.2 U10.6 | length 1808.9
  Top Layer w8.86: v1@132.54,60.47 U10.6@169.54,60.47
  Top Layer w15: v1(126.56,66.46) v1@132.54,60.47 ; R22.2@1180.12,347.44 1206.57,320.98 v1(1206.57,35.46)
  Bottom Layer w15: v1(126.56,66.46) 244.07,66.46 259.57,50.96 259.57,0.96 244.07,-14.54 179.07,-14.54 172.07,-21.54 172.07,-81.04 186.57,-95.54 388.61,-95.54 403.61,-80.54 1090.57,-80.54 v1(1206.57,35.46)
NetR23_1: R23.1 U11.7 | length 918.1
  Top Layer w14.17: v1(-2928.43,-78.54) -2874.98,-25.1 U11.7@-2791.34,-25.1
  Top Layer w15: v1(-3224.43,-145.54) -3202.76,-167.21 R23.1@-3202.76,-233.27
  Bottom Layer w15: v1(-3224.43,-145.54) -3038.43,-145.54 -3011.43,-118.54 -3011.43,43.96 -2996.93,58.46 -2901.93,58.46 -2887.43,43.96 -2887.43,-37.54 v1(-2928.43,-78.54)
NetU11_3: U11.3
NetU11_15: U11.15 U13.1 | length 732.6
  Top Layer w14.17: -2670.43,-85 -2670.43,85.4 -2655.93,99.9 U11.15@-2604.33,99.9
  Top Layer w15: U13.1@-2787.4,-363.19 -2843.43,-363.19 -2856.43,-350.19 -2856.43,-145.54 -2855.43,-144.54 -2729.97,-144.54 -2670.43,-85
RAW: J1.1 J2.1 PTC2.1 | length 4317.3
  Top Layer w15: v1(-2352.43,-238.54) v1(-1822.43,291.46) ; J1.1@-195.87,1683.07 13.18,1474.02 13.18,1311.89 -70.76,1227.96 -197.93,1227.96 -219.43,1206.46 -219.43,950.72 J2.1@-167.32,898.62
  Bottom Layer w15: -2935.04,-239.17 -2856.43,-239.17 -2838.56,-257.04 -2370.93,-257.04 v1(-2352.43,-238.54) ; v1(-1822.43,291.46) -816.43,291.46 -209.26,898.62 J2.1@-167.32,898.62
RAWIN: C16.1 C18.2 PTC2.2 Q1.5 Q1.6 Q1.7 Q1.8 U11.1 Z2.1 | length 3636.4
  Top Layer w14.17: -2861.24,778.56 -2861.24,145.72 -2840.43,124.9 U11.1@-2791.34,124.9
  Top Layer w15: v1(-3155.93,-184.54) -3172.43,-201.04 -3172.43,-341.34 Q1.5@-3195.87,-341.34 Q1.6@-3195.87,-391.34 Q1.7@-3195.87,-441.34 Q1.8@-3195.87,-491.34 -3195.43,-491.34 -3195.43,-618.54 -3211.43,-634.54 -3211.43,-892.54 -3210.43,-893.54 -3154.37,-893.54 C18.2@-3124.02,-863.19 -3033.47,-953.74 C16.1@-2644.69,-953.74 ; PTC2.2@-2935.04,10.83 -2945.43,10.83 -2945.43,808.4 -2841.43,912.4 Z2.1@-2768.7,912.4 -2768.7,871.1 -2861.24,778.56
  Bottom Layer w15: v1(-3155.93,-184.54) -3026.83,-184.54 -2990.93,-148.64 -2990.93,-45.06 -2935.04,10.83
SOLENOID: D2.1 J3.2 U3.2 U3.4 U4.2 U4.4 U5.2 U5.4 Z1.2 | length 5361.3
  Top Layer w15: v1(1136.57,445.46) 1138.78,447.66 U5.2@1138.78,513.78 1138.78,581.46 ; U5.4@1138.78,761.81 1138.78,581.46 ; U3.4@1377.95,171.26 1377.95,70.93 1379.39,69.49 1379.39,30.93 1377.95,29.49 U3.2@1377.95,-76.77 1377.95,-86.54 1344.07,-86.54 1329.43,-101.19 1329.43,-127.54 1328.33,-128.64 1246.47,-128.64 1245.37,-127.54 1245.37,435.47 1271.36,461.46 1271.36,581.46 1257.36,595.46 1152.78,595.46 1138.78,581.46 ; D2.1@1896.65,478.35 2020.57,478.35 2026.93,484.7 Z1.2@2151.57,484.7 2151.57,531.46 ; v1(2151.57,576.05) 2151.57,531.46 ; v1(2226.57,722.46) 2226.57,606.46 2151.57,531.46 ; J3.2@2943.9,546.26 2891.57,493.94 2891.57,166.46 3006.57,51.46 3019.07,-322.84 U4.4@3101.38,-322.84 U4.2@3101.38,-570.87
  Bottom Layer w15: v1(1136.57,445.46) 1155.07,463.96 1419.07,463.96 1444.07,438.96 1701.16,438.96 1800.57,538.37 1800.57,574.46 1819.07,592.96 1919.91,592.96 1936.81,576.05 v1(2151.57,576.05) ; v1(2226.57,722.46) 2767.7,722.46 J3.2@2943.9,546.26
XOUT: BRD1.36 C10.2 P7.2 U7.6 | length 2348.6
  Top Layer w15: P7.2@2556.5,1927.16 2736.57,1747.09 2736.57,1512.16 C10.2@2635.83,1411.42 2635.83,1353.36 2629.92,1347.46 U7.6@2629.92,1290.94
  Bottom Layer w15: BRD1.36@1297.83,1596.46 1344.83,1549.46 2072.07,1549.46 2169.07,1646.46 2323.57,1646.46 2413.57,1736.46 2413.57,1948.46 2434.31,1969.19 2514.47,1969.19 P7.2@2556.5,1927.16
YOUT: BRD1.37 C12.2 P7.5 U9.6 | length 2618.5
  Top Layer w15: v1(1954.57,1596.46) 1969.07,1581.96 1969.07,1290.46 2140.57,1118.96 2140.57,1014.59 2382.7,772.46 2644.07,772.46 2665.57,793.96 2665.57,880.67 2680.57,895.67 U9.6@2710.24,895.67 2787.4,895.67 C12.2@2805.12,877.95
  Bottom Layer w15: BRD1.37@1397.83,1596.46 v1(1954.57,1596.46) 2079.29,1596.46 2141.79,1658.96 2141.79,1812.46 P7.5@2256.5,1927.16
pads on no net: Bat1.0 Bat2.0 Bat3.0 BRD2.4 BRD2.6 BRD2.7 BRD2.8 BRD2.12 BRD2.13 BRD2.14 BRD2.18 BRD3.4 BRD3.6 BRD3.7 BRD3.8 BRD3.12 BRD3.13 BRD3.14 BRD3.20 BRD4.0 BRD4.1 BRD4.2 J1.0 J2.0 J3.0 J5.0 SD1.1 SD1.8 SD1.9 U7.1 U7.2 U7.5 U8.3 U8.10 U8.11 U9.1 U9.2 U9.5 U10.1 U10.7 U10.8 U10.12 U10.13 U10.21 U10.22 U10.23 U10.24 U12.1 U12.10 U12.11 U12.12 U12.14

## Keep-outs
Keep-Out Layer:
  lines w5: -3290.35,-928.31 ccw(c-3240.35,-928.31) -3240.35,-978.31 cw(c-3240.35,-1420) -2798.66,-1420 -2798.66,-1900 ; -3290,928.31 cw(c-3240,928.31) -3240,978.31 ccw(c-3240,1420) -2798.31,1420 -2798.31,1900 ; -3290,-928.31 -3290,928.31 ; -2798.78,-1900 ccw(c-2598.78,-1900) -2598.78,-2100 ; -2798.43,1900 cw(c-2598.43,1900) -2598.43,2100 2598.42,2100 cw(c2598.43,1900) 2798.43,1900 ; -2598.43,-2100 2598.42,-2100 ccw(c2598.43,-1900) 2798.43,-1900 ; 2798.31,-1900 2798.31,-1420 cw(c3240,-1420) 3240,-978.31 ccw(c3240,-928.31) 3290,-928.31 3290,928.31 ccw(c3240,928.31) 3240,978.31 cw(c3240,1420) 2798.31,1420 2798.31,1900

## Other copper
Multi-Layer:
  lines w10: 802.16,-103.35 802.16,-101.38 ; 1103.35,197.83 1105.31,197.83

## Silkscreen, mask and mechanical layers (free items; w line width, h text height)
Top Overlay:
  lines w10: 758.86,162.4 838.58,242.13 ; 760.83,239.17 764.76,239.17 841.53,162.4 842.52,162.4 ; 797.24,-2.95 703.74,-2.95 802.16,-101.38 ; 801.18,136.81 801.18,-2.95 901.93,-2.95 802.83,-102.05 ; 857.83,202.86 ccw(c801.18,198.82) 857.96,197.82 ; 861.22,196.85 1004.92,196.85 1004.92,297.6 1104.01,198.5 ; 1004.92,192.91 1004.92,99.41 1103.35,197.83
  text "GND" at -558.07,1980.31 h40
  text "CAN L" at -90.55,1980.31 h40
  text "M3" at -2643.7,1830.71 h60
  text "M3" at 2380.91,1700.79 h60
  text "CAN H" at -639.76,1664.37 h40
  text "Vin" at -98.43,1663.39 h40
  text "Teensy 3.2" at 1706.69,1228.35 h40
  text "GND" at -511.81,1212.6 h40
  text "CAN L" at -44.29,1212.6 h40
  text "CAN H" at -593.5,896.65 h40
  text "Vin" at -52.17,895.67 h40
  text "Ultimate GPS" at -333.66,509.29 h40
  text "Z" at 695.87,255.91 h80
  text "X" at 1180.12,234.25 h80 r180
  text "Y" at 778.54,-193.9 h80
  text "GND" at -2710.75,-1227.36 h40
  text "5V" at -2670.76,-1337.6 h40
  text "Servo5" at -2830.71,-1441.93 h40
  text "M3" at 2544.29,-1880.91 h60
  text "M3" at -2682.09,-1892.72 h60

## Text inside footprints (layer, text, board x,y; h text height)
Bat1: Top Overlay "MPD BK-18650-PC2" at -1023.66,59.8 h40 r90; Top Overlay "18650 Li-ION" at -2437.01,846.46 h40 r90; Top Overlay "Negative" at -963.66,2049.8 h40 r180; Top Overlay "+" at -1063.66,-1080.2 h80 r180; Bottom Overlay "+" at -1073.66,-1080.2 h80 r180
Bat2: Top Overlay "MPD BK-18650-PC2" at -2050.16,842.76 h40 r270; Top Overlay "18650 Li-ION" at -634.84,776.57 h40 r270; Top Overlay "Negative" at -2128.94,-1127.95 h40; Top Overlay "+" at -2010.16,1982.76 h80; Bottom Overlay "+" at -2000.16,1982.76 h80
Bat3: Top Overlay "MPD BK-18650-PC2" at -1276.81,-1636.77 h40; Top Overlay "18650 Li-ION" at -1429.13,-2062.99 h40; Top Overlay "Negative" at 686.02,-1700.79 h40 r90; Top Overlay "+" at -2416.81,-1596.77 h80 r90; Bottom Overlay "+" at -2416.81,-1586.77 h80 r90
Batt1: Top Overlay "Battery" at 1765.75,435.63 h40 r90; Top Overlay "+" at 1665.75,585.63 h40 r90; Top Overlay "Neg" at 1765.75,185.63 h40 r90; Bottom Overlay "+" at 1665.75,612.29 h40 r90; Bottom Overlay "Neg" at 1790.75,292.26 h40 r90
BRD1: Top Overlay "A11" at 1417.83,1456.44 h40 r90; Top Overlay "A10" at 1322.83,1443.11 h40 r90; Top Overlay "AREF" at 1217.83,1396.46 h40 r90; Top Overlay "VUSB" at 1062.83,1396.46 h40 r90; Top Overlay "Vin" at 917.83,1766.46 h40 r90; Top Overlay "AGND" at 1017.83,1766.46 h40 r90; Top Overlay "3.3V" at 1117.83,1766.46 h40 r90; Top Overlay "23 A9" at 1217.83,1766.46 h40 r90; Top Overlay "22 A8" at 1317.83,1766.46 h40 r90; Top Overlay "21 A7" at 1417.83,1766.46 h40 r90; Top Overlay "20 A6" at 1517.83,1766.46 h40 r90; Top Overlay "19 SCL" at 1617.83,1766.46 h40 r90; Top Overlay "18 SDA" at 1717.83,1766.46 h40 r90; Top Overlay "17 A3" at 1817.83,1766.46 h40 r90; Top Overlay "16 A2" at 1917.83,1766.46 h40 r90; Top Overlay "15 A1" at 2017.83,1766.46 h40 r90; Top Overlay "SDO 11" at 2117.83,816.46 h40 r90; Top Overlay "SDI 12" at 2217.83,809.8 h40 r90; Top Overlay "RX2 9" at 1917.83,836.46 h40 r90; Top Overlay "TX2 10" at 2017.83,803.13 h40 r90; Top Overlay "TX3 8" at 1817.83,836.46 h40 r90; Top Overlay "RX3 7" at 1717.83,836.46 h40 r90; Top Overlay "6" at 1617.83,996.41 h40 r90; Top Overlay "5" at 1517.83,996.41 h40 r90; Top Overlay "CANRX 4" at 1417.83,756.48 h40 r90; Top Overlay "CANTX 3" at 1317.83,756.48 h40 r90; Top Overlay "2" at 1217.83,996.41 h40 r90; Top Overlay "TX1 1" at 1117.83,846.46 h40 r90; Top Overlay "RX1 0" at 1017.83,843.12 h40 r90; Top Overlay "GND" at 917.83,916.43 h40 r90; Top Overlay "USB" at 947.83,1316.46 h60 r90; Bottom Overlay "USB" at 947.83,1476.46 h60 r90; Bottom Overlay "VUSB" at 1062.83,1548.08 h40 r90; Bottom Overlay "AREF" at 1217.83,1548.08 h40 r90; Bottom Overlay "A10" at 1322.83,1548.08 h40 r90; Bottom Overlay "A11" at 1417.83,1548.08 h40 r90; Bottom Overlay "CANTX 3" at 1322.83,1018.06 h40 r90; Bottom Overlay "CANRX 4" at 1422.83,1018.06 h40 r90; Bottom Overlay "GND" at 922.83,1018.06 h40 r90; Bottom Overlay "RX1 0" at 1022.83,1018.06 h40 r90; Bottom Overlay "RX3 7" at 1722.83,1018.06 h40 r90; Bottom Overlay "TX3 8" at 1822.83,1018.06 h40 r90; Bottom Overlay "SDI 12" at 2222.83,1018.06 h40 r90; Bottom Overlay "SDO 11" at 2122.83,1018.06 h40 r90; Bottom Overlay "TX1 1" at 1122.83,1018.06 h40 r90; Bottom Overlay "RX2 9" at 1922.83,1018.06 h40 r90; Bottom Overlay "TX2 10" at 2022.83,1018.06 h40 r90; Bottom Overlay "2" at 1222.83,1018.06 h40 r90; Bottom Overlay "5" at 1522.83,1018.06 h40 r90; Bottom Overlay "6" at 1622.83,1018.06 h40 r90; Bottom Overlay "Program" at 2276.21,1517.69 h40 r180; Bottom Overlay "A14" at 2276.21,1616.44 h40 r180; Bottom Overlay "VBat" at 2276.21,1221.44 h40 r180; Bottom Overlay "GND" at 2276.21,1418.94 h40 r180; Bottom Overlay "3.3V" at 2276.21,1320.19 h40 r180; Bottom Overlay "22 A8" at 1312.83,1968.06 h40 r90; Bottom Overlay "20 A6" at 1512.83,1968.06 h40 r90; Bottom Overlay "18 SDA" at 1712.83,2001.39 h40 r90; Bottom Overlay "13 SCK" at 2212.83,2001.39 h40 r90; Bottom Overlay "23 A9" at 1212.83,1968.06 h40 r90; Bottom Overlay "19 SCL" at 1612.83,2001.39 h40 r90; Bottom Overlay "16 A2" at 1912.83,1961.4 h40 r90; Bottom Overlay "Vin" at 912.83,1881.42 h40 r90; Bottom Overlay "3.3V" at 1112.83,1921.41 h40 r90; Bottom Overlay "AGND" at 1012.83,1928.08 h40 r90; Bottom Overlay "21 A7" at 1412.83,1961.4 h40 r90; Bottom Overlay "17 A3" at 1812.83,1961.4 h40 r90; Bottom Overlay "14 A0" at 2112.83,1961.4 h40 r90; Bottom Overlay "15 A1" at 2012.83,1948.07 h40 r90
BRD2: Top Overlay "20" at 2940.94,6.89 h40; Top Overlay "11" at 2957.99,-692.83 h40; Top Overlay "10" at 1857.99,-692.83 h40; Top Overlay "1" at 1897.99,17.17 h40
BRD3: Top Overlay "20" at 1742.13,-932.09 h40; Top Overlay "11" at 1963.9,-1664.29 h40; Top Overlay "10" at 863.9,-1664.29 h40; Top Overlay "1" at 903.9,-954.29 h40
BRD4: Top Overlay "PPS" at -408.3,644.28 h30 r90; Top Overlay "Vin" at -308.3,644.28 h30 r90; Top Overlay "GND" at -208.3,644.28 h30 r90; Top Overlay "RX" at -108.3,649.28 h30 r90; Top Overlay "TX" at -8.3,644.28 h30 r90; Top Overlay "FIX" at 91.7,644.28 h30 r90; Top Overlay "VBAT" at 191.7,644.28 h30 r90; Top Overlay "EN" at 291.7,649.28 h30 r90; Top Overlay "3.3V" at 391.7,644.28 h30 r90; Bottom Overlay "VBAT" at 191.7,749.24 h30 r90; Bottom Overlay "FIX" at 91.7,714.25 h30 r90; Bottom Overlay "GND" at -208.3,719.25 h30 r90; Bottom Overlay "Vin" at -308.3,714.25 h30 r90; Bottom Overlay "3.3V" at 391.7,744.24 h30 r90; Bottom Overlay "EN" at 291.7,689.26 h30 r90; Bottom Overlay "TX" at -8.3,689.26 h30 r90; Bottom Overlay "RX" at -108.3,689.26 h30 r90; Bottom Overlay "PPS" at -408.3,719.25 h30 r90
C3: Top Overlay "-" at 498.35,-687.95 h40 r90; Top Overlay "+" at 498.35,-1142.95 h40 r90; Bottom Overlay "+" at 498.35,-1082.95 h40 r90; Bottom Overlay "-" at 498.35,-762.95 h40 r90
C4: Top Overlay "-" at 74.63,-687.95 h40 r90; Top Overlay "+" at 74.63,-1142.95 h40 r90; Bottom Overlay "+" at 74.63,-1082.95 h40 r90; Bottom Overlay "-" at 74.63,-762.95 h40 r90
C7: Top Overlay "+" at -349.09,-1142.95 h40 r90; Top Overlay "-" at -349.09,-687.95 h40 r90; Bottom Overlay "-" at -349.09,-762.95 h40 r90; Bottom Overlay "+" at -349.09,-1082.95 h40 r90
C16: Top Overlay "+" at -2624.68,-1093.74 h40 r90; Top Overlay "-" at -2624.68,-638.74 h40 r90; Bottom Overlay "-" at -2624.68,-713.74 h40 r90; Bottom Overlay "+" at -2624.68,-1033.74 h40 r90
J1: Top Overlay "1" at -198.54,1519.61 h60; Top Overlay "3" at -198.54,2009.61 h60; Top Overlay "4" at -388.54,2009.61 h60; Top Overlay "2" at -388.54,1519.61 h60
J2: Top Overlay "1" at -170,735.16 h60; Top Overlay "3" at -170,1225.16 h60; Top Overlay "4" at -360,1225.16 h60; Top Overlay "2" at -360,735.16 h60
J3: Top Overlay "2" at 2941.22,656.26 h60; Top Overlay "1" at 2941.22,166.26 h60
J5: Top Overlay "5" at 2448.82,-1935.04 h60 r90; Top Overlay "1" at 2093.5,-1230.31 h60 r90
U2: Top Overlay "GND" at 867.28,-487.35 h40 r90; Top Overlay "5V" at 844.28,-351.35 h40 r90; Top Overlay "TAB" at 645.28,-497.35 h40 r90; Top Overlay "Vin" at 843.28,-633.35 h40 r90